# Altium PCB VECTOR_routed_no_sc.PcbDoc (part 2 of 3)
Units mil, origin at the board's own origin, x right, y up, seen from the top; angles counter-clockwise.
Board outline 6000 x 4000 mil, 8 copper layers (Top Layer, Signal Layer 1, Signal Layer 2, Signal Layer 3, Signal Layer 4, VCC, Ground, Bottom Layer), stack 66.302 mil thick; 115 components, 252 nets, 1062 pads, 531 vias.
Unrouted connection lines stored in the file: 3.
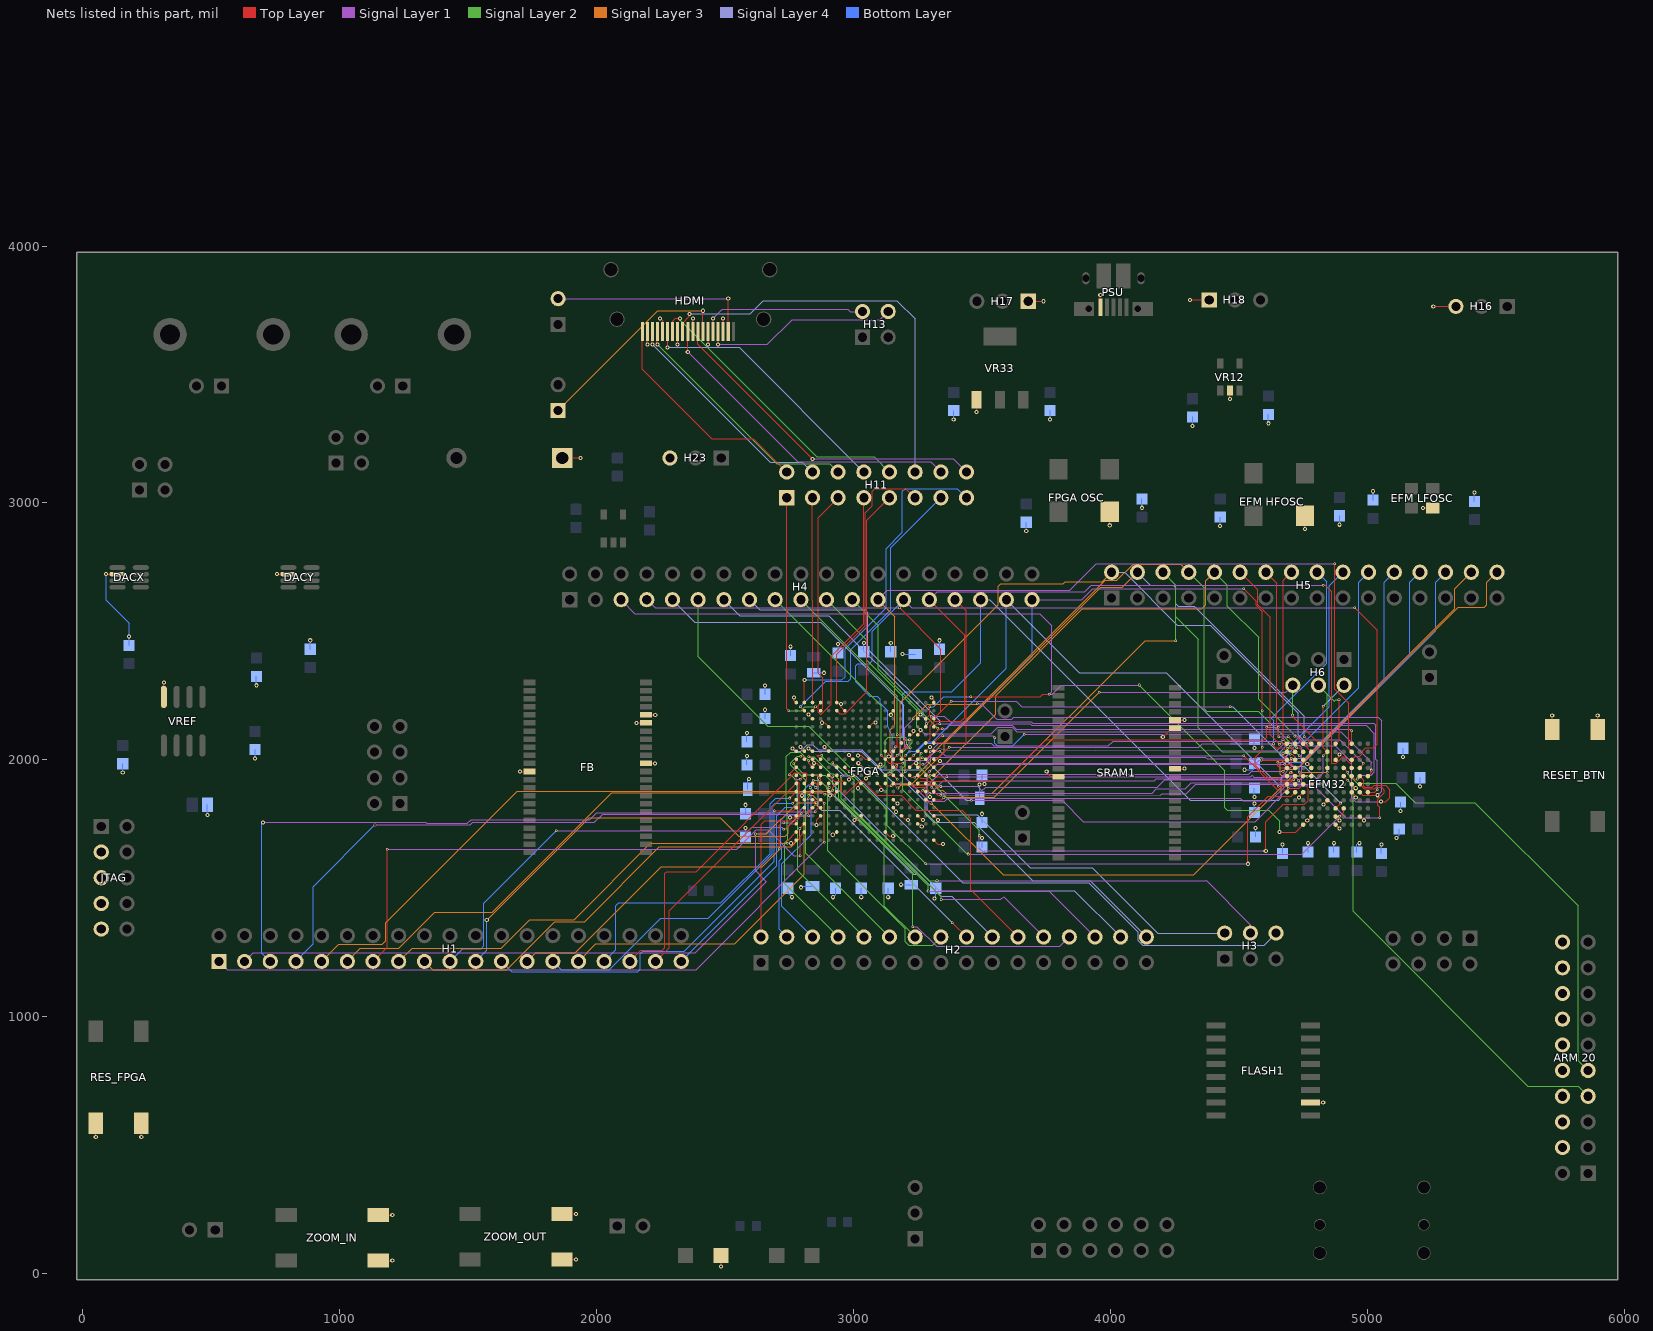
[diagram p8: the nets of this part, all layers, seen from the top]

## Via types
v1: diameter 10, hole 6, Top Layer to Bottom Layer, 277 vias
v2: diameter 16, hole 8, Top Layer to Bottom Layer, 252 vias
v3: diameter 10/10/10/10/10/10 (per signal layer), hole 6, Top Layer to Bottom Layer, 2 vias

## Nets (pads, with @x,y where several pads share a name; then routed paths per layer and width w, separated by ;. In a path a pad name is that pad's centre, name@x,y a point inside that pad or via, vN(x,y) a via of type N, cw(c..) or ccw(c..) an arc to the next point about the centre after c; other vN are vias at no path point) (continued)
EBI.A2: EFM32.L3 FPGA.C17 H4.5 | length 3890.4
  Top Layer w4: FPGA.C17@3281.22,2159.72 3297,2175.5 v1(3297,2206) ; v1(3457,2245) 3727.11,2245 3737,2254.88 v1@3761.88,2254.88 ; v2(4659,1718) 4720.99,1718 EFM32.L3@4750.51,1747.52
  Signal Layer 1 w4: H4.5@2095.08,2623.03 2149.11,2569 3724,2569 3772,2521 3772,2265 v1(3762,2255) 3773,2255 3809,2291 v1(4113,2291)
  Signal Layer 2 w4: v1(4113,2291) 4113,2290 4445,1958 4445,1814 4455,1804 4616,1804 4659,1761 v2(4659,1718)
  Bottom Layer w4: v1(3297,2206) 3312,2206 3351,2245 v1(3457,2245)
EBI.A3: EFM32.J7 FPGA.C18 H4.7 | length 3275.2
  Top Layer w4: v1(3179,2591) 3339,2431 3339,2186.01 ; FPGA.C18@3312.72,2159.72 3339,2186.01 ; v1(3380.71,2227.72) 3339,2186.01 ; EFM32.J7@4876.5,1810.51 v1(4897.49,1831.51)
  Signal Layer 1 w4: H4.7@2195.08,2623.03 2227.11,2591 v1(3179,2591) ; v1(3380.71,2227.72) 3632.54,2227.72 3654.03,2206.22 v1(4466.52,2206.22)
  Signal Layer 4 w4: v1(4466.52,2206.22) 4475.78,2206.22 4708,1974 4755,1974 v1(4897.49,1831.51)
EBI.A4: EFM32.J8 FPGA.F14 H4.9 | length 3393.2
  Top Layer w4: FPGA.F14@3186.73,2065.24 3199.4,2077.91 3199.4,2078 v1(3218,2078) ; v1(4892,1779.5) 4907.99,1795.49 EFM32.J8@4907.99,1810.51
  Signal Layer 1 w4: v1(3447,1633) 4745.5,1633 v1(4892,1779.5)
  Signal Layer 2 w4: v1(3218,2078) 3228.28,2078 3228.64,2077.64 3228.64,2065.64 3192,2029 3192,2006.16 3201,1997.16 3201,1977 3192,1968 3192,1883.49 3442.49,1633 v1(3447,1633)
  Signal Layer 4 w4: H4.9@2295.08,2623.03 2382.11,2536 2872,2536 3196.46,2211.54 3196.46,2078 v1(3218,2078)
EBI.A5: EFM32.G10 FPGA.G14 H4.11 | length 3810.3
  Top Layer w4: v1(3207.53,2056) 3186.73,2035.2 FPGA.G14@3186.73,2033.74 3198.99,2046 v1(3220,2046) ; EFM32.G10@4970.98,1873.5 4982.49,1862 v2(5040,1862)
  Signal Layer 1 w4: v1(3220,2046) 3204,2046 3199,2051 3199,2124 3233,2158 v1(3233,2159) ; v1(3482,2218) 3498,2218 3558,2158 3616,2158 3623,2165 5043,2165 5056,2152 5056,1878 v2(5040,1862)
  Signal Layer 2 w4: H4.11@2395.08,2623.03 2395.08,2401.92 2666,2131 2825,2131 2986,1970 3111,1970 3124,1983 3124,2076 3135,2087 3201,2087 3207.53,2080.47 v1(3207.53,2056)
  Signal Layer 3 w4: v1(3233,2159) 3233,2163 3287,2217 3481,2217 v1(3482,2218)
EBI.A6: EFM32.G11 FPGA.D17 H4.13 | length 3109.1
  Top Layer w4: FPGA.D17@3281.22,2128.23 3281.22,2140.2 3282.02,2141 v1(3284,2141) 3284,2142.98 3286.98,2140 3303,2156.02 v1(3303,2170) ; EFM32.G11@5002.48,1873.5 5029,1873.5 v1(5039,1883.5)
  Signal Layer 1 w4: v1(3303,2170) 3354,2170 3376,2148 3691,2148 3697,2142 5026,2142 5033,2135 5033,2002.5 5039,1996.5 v1(5039,1883.5)
  Signal Layer 4 w4: H4.13@2495.08,2623.03 2557.11,2561 2904,2561 3271,2194 3271,2164.94 3284,2151.94 v1(3284,2141)
EBI.A7: EFM32.E9 FPGA.D18 H4.15 | length 3020.4
  Top Layer w4: FPGA.D18@3312.72,2128.23 3324.49,2140 v1(3336,2140) ; EFM32.E9@4939.49,1936.5 4950.98,1925 v3(4961,1925)
  Signal Layer 1 w4: v1(3336,2140) 3688,2140 3694,2134 4996,2134 5028,2102 5028,1953 5015,1940 4976,1940 v3(4961,1925)
  Signal Layer 4 w4: H4.15@2595.08,2623.03 2634.11,2584 3045,2584 3056,2573 3056,2431 3336,2151 v1(3336,2140)
EBI.A8: EFM32.E10 FPGA.H12 H4.17 | length 3177.4
  Top Layer w4: v1(3108,2017.98) FPGA.H12@3123.74,2002.24 3138.98,1987 v1(3191,1987) ; EFM32.E10@4970.98,1936.5 4987,1920.48 4987,1896 4990,1893 5020,1893 5027,1900 5071,1900 5087,1884 5087,1852 5072,1837 v2(5053,1837)
  Signal Layer 1 w4: v1(3191,1987) 3202,1998 3283,1998 3329,2044 3364,2039 4521,2035 4647,2035 4679,2067 4745,2067 4757,2055 4875,2055 4940,1990 4940,1852 4955,1837 v2(5053,1837)
  Signal Layer 2 w4: H4.17@2695.08,2623.03 3108,2210.11 v1(3108,2017.98)
EBI.A9: EFM32.F10 FPGA.G13 H4.19 | length 3144.8
  Top Layer w4: v1(3163,2050) 3174,2050 3170.98,2053.02 v1(3170.98,2098) ; EFM32.F10@4970.98,1905 4988.08,1887.9 5029,1887.9 5034.6,1893.5 5055.5,1893.5 5067,1882 5067,1872 5041,1846 5041,1823 5049,1815 v1(5049,1774.99) ; FPGA.G13@3155.24,2033.74 3155.24,2042 3170.76,2057.52 3155.38,2042.61 FPGA.G13@3155.24,2033.74
  Signal Layer 1 w4: v1(3163,2050) 3163,2041 3155,2033 3155,1976.97 3292.97,1839 3355,1839 3366,1850 4505,1850 4515,1840 4623,1840 4682,1899 4792,1899 4916.01,1774.99 v1(5049,1774.99)
  Signal Layer 2 w4: H4.19@2795.08,2623.03 3170.98,2247.13 v1(3170.98,2098)
EBI.A10: EFM32.E11 FPGA.E16 H4.21 | length 2571.3
  Top Layer w4: FPGA.E16@3249.72,2096.73 3261.42,2108.42 v2(3261.42,2116.54) ; EFM32.E11@5002.48,1936.5 5016,1950.02 v1(5016,1960)
  Signal Layer 1 w4: v2(3261.42,2116.54) 3275.95,2102 3537,2102 3562,2127 3617,2127 3635.77,2108.23 4897.73,2108.23 5018,1987.96 5016,1985.96 v1(5016,1960)
  Signal Layer 2 w4: H4.21@2895.08,2623.03 3052,2466.11 3052,2387 3247,2192 3247,2130.95 v2(3261.42,2116.54)
EBI.A11: EFM32.A9 FPGA.E18 H4.23 | length 2349.6
  Top Layer w4: FPGA.E18@3312.72,2096.73 3328.46,2112.48 ; v1(3328.46,2122) 3328.46,2112.48 ; v1(3345,2121) 3336.98,2121 3328.46,2112.48 ; EFM32.A9@4939.49,2062.48 v1(4939.49,2112.23)
  Signal Layer 1 w4: v1(3345,2121) 3361.94,2121 3374.94,2134 3617.53,2134 3633.53,2118 4933.72,2118 v1(4939.49,2112.23)
  Signal Layer 2 w4: H4.23@2995.08,2623.03 3095.78,2522.33 3095.78,2354.69 v1(3328.46,2122)
EBI.A12: EFM32.B9 FPGA.K12 H4.25 | length 3336.6
  Top Layer w4: FPGA.K12@3123.74,1939.25 3140.24,1939.25 3142,1941.01 v1(3142,1947) ; v1(4873,2763) 4873,2275 4928,2220 4928,2042.47 EFM32.B9@4939.49,2030.98
  Signal Layer 1 w4: H4.25@3095.08,2623.03 3132.05,2660 3842,2660 3945,2763 v1(4873,2763)
  Signal Layer 3 w4: H4.25@3095.08,2623.03 3161,2557.11 3161,2136 3142,2117 3142,2030 3148,2024 3148,1953 v1(3142,1947)
EBI.A13: EFM32.C9 FPGA.K13 H4.27 | length 3370.7
  Top Layer w4: FPGA.K13@3155.24,1939.25 3170.49,1924 v1(3171,1924) ; EFM32.C9@4939.49,1999.49 4954,2014 4971,2014 4982,2025 4982,2035 4994,2047 5025,2047 5038,2060 5038,2504 v1(4951,2591)
  Signal Layer 1 w4: H4.27@3195.08,2623.03 3227.11,2591 v1(4951,2591)
  Bottom Layer w4: v1(3171,1924) 3150,1945 3150,2087.22 3134,2128.11 3134,2190.21 3103.94,2220.28 3103.94,2235.63 3091.57,2248 3063,2248 3008,2303 3008,2365 3017,2374 3061,2374 3072,2385 3072,2499.95 H4.27@3195.08,2623.03
EBI.A14: EFM32.D9 FPGA.F17 H4.29 | length 3121.9
  Top Layer w4: FPGA.F17@3281.22,2065.24 3297.99,2082.01 3297.99,2131.99 3315,2149 3418,2149 3433,2164 3433,2485.11 H4.29@3295.08,2623.03 ; v1(4829,2680) 4837,2680 4862,2655 4862,1987 4880,1987 4904,2011 4913,2011 4921,2003 4921,1998.49 4939.49,1980 EFM32.D9@4939.49,1967.99
  Signal Layer 1 w4: H4.29@3295.08,2623.03 3326.61,2654.56 3899.56,2654.56 3925,2680 v1(4829,2680)
EBI.A15: EFM32.D10 FPGA.F18 H4.31 | length 2499.9
  Top Layer w4: v1(3348,2094) 3341.48,2094 FPGA.F18@3312.72,2065.24 3432.25,2065.24 3438,2070.98 3438,2580.11 H4.31@3395.08,2623.03 ; EFM32.D10@4970.98,1967.99 4985,1982.01 v1(4985,1986)
  Signal Layer 1 w4: v1(3348,2094) 3542,2094 v1(3550,2086) ; v1(3665,2100) 4203.02,2100 4223.02,2101.73 4720,2100 4741.63,2078.37 4892.63,2078.37 v1(4985,1986)
  Bottom Layer w4: v1(3550,2086) 3550,2065 3560,2055 3620,2055 v1(3665,2100)
EBI.A16: EFM32.E4 FPGA.H13 H4.33 | length 2560.5
  Top Layer w4: FPGA.H13@3155.24,2002.24 v1(3170.98,2017.99) ; v1(4766.25,1936) 4781.51,1936 EFM32.E4@4782.01,1936.5
  Signal Layer 4 w4: H4.33@3495.08,2623.03 3529.97,2623.03 4310,1843 4655,1843 4666,1854 4666,1928 4675,1937 4765.25,1937 v1(4766.25,1936)
  Bottom Layer w4: v1(3170.98,2017.99) 3184.45,2031.46 3184.45,2085.95 3190.98,2092.49 3190.98,2255 3200.98,2265 3382,2265 3495.08,2378.08 H4.33@3495.08,2623.03
EBI.A17: EFM32.F1 FPGA.H14 H4.35 | length 2220.7
  Top Layer w4: FPGA.H14@3186.73,2002.24 v1(3202.48,2017.99) ; v1(4654,1897) 4679.52,1897 EFM32.F1@4687.52,1905
  Signal Layer 4 w4: H4.35@3595.08,2623.03 3879.11,2339 4217,2339 4654,1902 v1(4654,1897)
  Bottom Layer w4: v1(3202.48,2017.99) 3217.49,2033 3242.48,2033 3279.48,2070 3308,2070 3595.08,2357.08 H4.35@3595.08,2623.03
EBI.A18: EFM32.F2 FPGA.H15 H4.37 | length 2616.9
  Top Layer w4: FPGA.H15@3218.23,2002.24 v1(3233.98,2017.99) ; v1(4519,2666) 4567,2618 4567,2601.47 4592,2576.47 v1(4592,2190) ; v1(4592,2048) 4592,2037 4564.49,2009.49 4564.49,1979.51 4614,1930 4650,1930 4661,1919 4701.64,1919 4706,1914.64 4709.38,1914.64 EFM32.F2@4719.02,1905
  Signal Layer 1 w4: H4.37@3695.08,2623.03 3888.03,2623.03 3931,2666 v1(4519,2666)
  Bottom Layer w4: v1(3233.98,2017.99) 3279.98,2064 3353.98,2064 3695.08,2405.09 H4.37@3695.08,2623.03 ; v1(4592,2048) v1(4592,2190)
EBI.A19: EFM32.F3 FPGA.H16 | length 1661.8
  Top Layer w4: FPGA.H16@3249.72,2002.24 3255.48,2008 v1(3268,2008) ; v1(4693,1889) 4734.51,1889 EFM32.F3@4750.51,1905
  Signal Layer 1 w4: v1(3458,1842) 3812,1842 3895,1759 4563,1759 v1(4693,1889)
  Signal Layer 4 w4: 3273,2008 3439,1842 v1(3458,1842)
EBI.A20: EFM32.F4 FPGA.G16 | length 1991.7
  Top Layer w4: FPGA.G16@3249.72,2033.74 3257.46,2026 v1(3264,2026) ; v2(4605,1645) 4605,1758 4673,1826 4755,1826 4770,1841 4770,1892.99 EFM32.F4@4782.01,1905
  Signal Layer 1 w4: v1(3490,1705) 3490,1655 3506,1639 3512,1645 v2(4605,1645)
  Signal Layer 2 w4: v1(3264,2026) 3259,2021 3259,1968 3330,1897 3330,1885 3490,1725 v1(3490,1705)
EBI.A21: EFM32.G1 FPGA.G18 | length 1441.2
  Top Layer w4: FPGA.G18@3312.72,2033.74 v1(3335,2033.74) ; v1(4518.5,2015) 4650.5,1883 4678.02,1883 EFM32.G1@4687.52,1873.5
  Signal Layer 1 w4: v1(3335,2033.74) 3338.26,2033.74 3357,2015 v1(4518.5,2015)
EBI.A22: EFM32.G2 FPGA.J13 | length 2154.3
  Top Layer w4: FPGA.J13@3155.24,1970.75 3169.75,1970.75 3168,1972.5 v1(3168,1979) ; v2(4535,1595) 4535,1779 4614,1858 4703.51,1858 EFM32.G2@4719.02,1873.5
  Signal Layer 1 w4: v1(3280.68,1595) v2(4535,1595)
  Signal Layer 2 w4: v1(3168,1979) 3168,1969 3157,1958 3142,1958 3132,1948 3132,1743.68 v1(3280.68,1595)
EBI.CS0: EFM32.D6
EBI.CS1: EFM32.A5 FPGA.N18 H6.6 | length 1852.8
  Top Layer w4: FPGA.N18@3312.72,1844.76 3335,1845 3342.47,1845 v1(3350.47,1853) ; v1(4709,2174) 4709,2166.98 EFM32.A5@4813.5,2062.48
  Signal Layer 1 w4: v1(3956,2263) 4683,2263 H6.6@4710,2290
  Signal Layer 2 w4: v1(4709,2174) 4709,2289 H6.6@4710,2290
  Signal Layer 3 w4: v1(3350.47,1853) 3351.47,1854 3547,1854 v1(3956,2263)
EBI.D0: EFM32.B4 FPGA.K14 H5.2 | length 2498.4
  Top Layer w4: FPGA.K14@3186.73,1939.25 v1(3201,1953.52) ; v1(4766,2065) 4766,2046.99 EFM32.B4@4782.01,2030.98
  Signal Layer 3 w4: v1(3201,1953.52) 3201,1997.16 3182,2016.16 3182,2222.18 3563,2603.18 3563,2675 3574,2686 3817,2686 3824,2693 3968,2693 H5.2@4005,2730
  Signal Layer 4 w4: H5.2@4005,2730 4055,2730 4261,2524 4388,2524 4731.34,2180.66 4731.34,2096.66 4763,2065 v1(4766,2065)
EBI.D1: EFM32.A4 FPGA.L12 H5.4 | length 2385.4
  Top Layer w4: FPGA.L12@3123.74,1907.76 3133.5,1898 v1(3146,1898) ; v1(4755,2089.49) EFM32.A4@4782.01,2062.48
  Signal Layer 3 w4: v1(3146,1898) 3146,1899 3154,1907 3228.59,1907 3353,2031.41 3353,2063 3962,2672 4047,2672 H5.4@4105,2730
  Signal Layer 4 w4: H5.4@4105,2730 4155,2680 4245,2680 4255,2670 4255,2608 4265,2598 4326,2598 4755,2169 v1(4755,2089.49)
EBI.D2: EFM32.C3 FPGA.L13 H5.6 | length 2587.5
  Top Layer w4: FPGA.L13@3155.24,1907.76 v1(3173,1890) ; v1(4734.76,2015.24) EFM32.C3@4750.51,1999.49
  Signal Layer 2 w4: H5.6@4205,2730 4255,2680 4255,2557 ; v1(4255,2464) 4255,2557 ; v1(4734.76,2015.24) 4719,2031 4436,2031 4342,2125 4342,2470 4255,2557
  Signal Layer 3 w4: v1(3173,1890) 3185,1902 3314,1902 3334,1882 3348,1882 3361,1869 3540,1869 4135,2464 v1(4255,2464)
EBI.D3: EFM32.B3 FPGA.K15 H5.8 | length 2471.6
  Top Layer w4: FPGA.K15@3218.23,1939.25 3225.48,1932 v1(3238,1932) ; v1(4725.66,2046.73) 4734.76,2046.73 EFM32.B3@4750.51,2030.98
  Signal Layer 2 w4: H5.8@4305,2730 4365,2670 4365,2199.5 4375,2189.5 4576,2189.5 4707.57,2057.93 4714.46,2057.93 v1(4725.66,2046.73)
  Signal Layer 3 w4: v1(3238,1932) 3300.49,1994.49 3300.49,2018.49 3980,2698 4025,2698 4089,2762 4273,2762 H5.8@4305,2730
EBI.D4: EFM32.A3 FPGA.K16 H5.10 | length 2401.8
  Top Layer w4: FPGA.K16@3249.72,1939.25 3260.98,1928 3288,1928 v1(3299,1939) ; v1(4718,2092) 4720.99,2092 EFM32.A3@4750.51,2062.48
  Signal Layer 2 w4: H5.10@4405,2730 4455,2680 4455,2598 4577,2476 4577,2235.99 4718,2094.99 v1(4718,2092)
  Signal Layer 3 w4: v1(3299,1939) 3315,1939 3553,2177 3553,2250 3890,2587 4355,2587 4371,2603 4371,2696 H5.10@4405,2730
EBI.D5: EFM32.B2 FPGA.L15 H5.12 | length 2592.9
  Top Layer w4: FPGA.L15@3218.23,1907.76 3233.98,1892 3279,1892 3292,1879 3292,1875 v1(3297,1870) ; H5.12@4505,2730 4573.47,2661.53 4573.47,2603.53 4623,2554 4623,2097 4657,2063 v1(4657,2061) ; v1(4690,2045) 4707.02,2045 ; v1(4700.02,2053) 4707.02,2046 4707.02,2045 ; 4707.02,2045 EFM32.B2@4719.02,2030.98 4707.02,2042.98 4707.02,2045
  Signal Layer 1 w4: v1(3297,1870) 3298,1869 4162,1869 4179.26,1886.26 4292.26,1886.26 4315.68,1909.68 4745,1909.68 4745,2047 4735,2057 4704.02,2057 v1(4700.02,2053)
  Signal Layer 3 w4: v1(4657,2061) 4660,2061 4667,2068 v1(4690,2045)
EBI.D6: EFM32.A2 FPGA.L16 H5.14 | length 2252.9
  Top Layer w4: FPGA.L16@3249.72,1907.76 3258.97,1917 3589,1917 3749,2077 4598,2077 4608,2087 v1(4608,2126) ; H5.14@4605,2730 4647,2688 4647,2132 v1(4653,2126) 4653,2092 v1(4655,2090) ; v1(4692,2090) 4719.02,2062.98 EFM32.A2@4719.02,2062.48
  Signal Layer 1 w4: v1(4608,2126) v1(4653,2126) ; v1(4655,2090) v1(4692,2090)
EBI.D7: EFM32.A1 FPGA.H17 H5.16 | length 2123.7
  Top Layer w4: FPGA.H17@3281.22,2002.24 3299,2020.02 v3(3299,2031) ; EFM32.A1@4687.52,2062.48 v1(4672,2078) 4673,2698 H5.16@4705,2730
  Signal Layer 1 w4: v3(3299,2031) 3332,2064 3537,2064 3546.53,2054.47 3992.5,2054.47 4010.76,2072.73 4666.73,2072.73 v1(4672,2078)
EBI.D8: EFM32.B1 FPGA.H18 H5.18 | length 2193.2
  Top Layer w4: FPGA.H18@3312.72,2002.24 3326.24,2002.24 v1(3373,2049) ; v1(4635,2063) 4635,2054 4641.57,2047.43 4671.08,2047.43 EFM32.B1@4687.52,2030.98
  Signal Layer 1 w4: v1(3373,2049) 4343,2049 4357,2063 v1(4635,2063)
  Bottom Layer w4: v1(4635,2063) 4635,2153 4627,2161 4842,2376 4842,2693 H5.18@4805,2730
EBI.D9: EFM32.C2 FPGA.J16 H5.20 | length 2388.7
  Top Layer w4: FPGA.J16@3249.72,1970.75 3261.98,1983 v1(3269,1983) ; v1(4701,2021) 4708,2021 4719.02,2009.98 EFM32.C2@4719.02,1999.49
  Signal Layer 1 w4: v1(3269,1983) 3278,1983 3305,2010 4370,2010 4377,2003 4567,2003 4574,2010 4589,2010 4596,2003 4674,2003 4692,2021 v1(4701,2021)
  Bottom Layer w4: v1(4701,2021) 4692,2021 4676.24,2005.24 4661.77,2018.46 4661.77,2031.77 4695,2065 4710,2065 4852,2207 4852,2677 H5.20@4905,2730
EBI.D10: EFM32.C1 FPGA.J18 H5.22 | length 2295.1
  Top Layer w4: FPGA.J18@3312.72,1970.75 v2(3337,1995) ; v1(4588,1999) 4687.03,1999 EFM32.C1@4687.52,1999.49 4672,2015.01 v1(4672,2023)
  Signal Layer 1 w4: v2(3337,1995) 3345,1987 4567,1987 4579,1999 v1(4588,1999)
  Bottom Layer w4: v1(4672,2023) 4672,2020.46 4671.77,2020.24 4689.16,2035.62 4705,2035.62 4715.34,2050.57 4739.26,2074.49 4760.31,2074.49 4966,2280.17 4966,2691 H5.22@5005,2730
EBI.D11: EFM32.D2 FPGA.K17 H5.24 | length 2415.8
  Top Layer w4: FPGA.K17@3281.22,1939.25 v1(3297,1955) ; v1(4678,1982) 4705.01,1982 4711.01,1976 ; v1(4703.27,2005) 4703.27,1983.74 4711.01,1976 ; EFM32.D2@4719.02,1967.99 4711.01,1976
  Signal Layer 1 w4: v1(3297,1955) 3324,1982 v1(4678,1982)
  Bottom Layer w4: v1(4703.27,2005) 4756,2005 5066,2315 5066,2691 H5.24@5105,2730
EBI.D12: EFM32.D1 FPGA.K18 H5.26 | length 2560.9
  Top Layer w4: FPGA.K18@3312.72,1939.25 3318.97,1933 v1(3363,1933) ; v1(4652,1990) 4652,1976 4660.01,1967.99 EFM32.D1@4687.52,1967.99
  Signal Layer 1 w4: v1(3363,1933) 4545.75,1933 4552,1939.25 4559,1932.25 4665.25,1932.25 4706,1975 4691,1990 v1(4652,1990)
  Bottom Layer w4: v1(4652,1990) 4739.26,1990 4743.26,1986 5166,2408.74 5166,2691 H5.26@5205,2730
EBI.D13: EFM32.E3 FPGA.L17 H5.28 | length 2550.9
  Top Layer w4: FPGA.L17@3281.22,1907.76 3300,1907.76 3300,1898 v1(3305,1893) ; v1(4733,1919) EFM32.E3@4750.51,1936.5 v1(4735,1952)
  Signal Layer 1 w4: v1(3305,1893) 3310,1888 3319,1888 3350,1919 4170,1919 4178,1927 4666.5,1927 4672.5,1933 4719,1933 v1(4733,1919)
  Bottom Layer w4: v1(4735,1952) 4735,1971.5 5266,2502.5 5266,2691 H5.28@5305,2730
EBI.D14: EFM32.E2 FPGA.L18 H5.30 | length 2675.8
  Top Layer w4: FPGA.L18@3312.72,1907.76 3324.47,1896 v1(3339,1896) ; v1(4703,1952) 4703.51,1952 EFM32.E2@4719.02,1936.5 4705.52,1923 4706.52,1922 v1(4714,1922)
  Signal Layer 1 w4: v1(3339,1896) 3483,1896 3500,1879 3514,1893 4183,1893 4212,1922 v1(4714,1922)
  Signal Layer 3 w4: v1(4703,1952) 4684,1933 4673,1933 4662,1944 4662,1985.74 4675,1998.74 4684.26,1998.74 4749,1995 5341,2587 5341,2666 H5.30@5405,2730
EBI.D15: EFM32.E1 FPGA.M16 H5.32 | length 2685.1
  Top Layer w4: FPGA.M16@3249.72,1876.26 3265,1876.26 v1(3269.32,1880.58) ; v1(4672,1955.35) 4672,1952.02 EFM32.E1@4687.52,1936.5
  Signal Layer 1 w4: v1(3269.32,1880.58) 3331.99,1943.25 4538.25,1943.25 4550.35,1955.35 v1(4672,1955.35)
  Signal Layer 3 w4: v1(4672,1955.35) 4672.35,1955.35 4681,1964 4726,1964 5355,2593 5455,2593 5466,2604 5466,2691 H5.32@5505,2730
EBI.REN: EFM32.A7 FPGA.N17 H6.4 | length 2437.6
  Top Layer w4: FPGA.N17@3281.22,1844.76 3296.98,1829 v1(3305,1829) ; EFM32.A7@4876.5,2062.48 4890,2075.98 v1(4890,2233)
  Signal Layer 2 w4: H6.4@4810,2290 4845,2255 ; v1(4844,1951) 4844,2254 4845,2255 ; v1(4890,2233) 4877,2233 4872,2228 4845,2255
  Signal Layer 3 w4: v1(3305,1829) 3582,1552 4325.3,1552 4710.3,1937 4733,1937 4747,1951 v1(4844,1951)
EBI.WEN: EFM32.B6 FPGA.M18 H6.2 | length 1947.3
  Top Layer w4: FPGA.M18@3312.72,1876.26 3326.98,1862 v1@3340,1862 ; v1(4828.98,2014.97) EFM32.B6@4845,2030.98 4828.98,2047 v1(4829,2209)
  Signal Layer 1 w4: v1@3340,1862 3342,1864 3360,1864 4195,1861 4201.5,1867.5 4294.5,1867.5 4332,1905 4784.98,1905 4828.98,1949 v1(4828.98,2014.97)
  Signal Layer 4 w4: v1(4829,2209) H6.2@4910,2290
  other v1: 3340,1861
FB.A0: FPGA.N4 H1.1 | length 2747.7
  Top Layer w4: FPGA.N4@2871.77,1844.76 v1(2886.22,1830.32)
  Signal Layer 1 w4: H1.1@529.33,1215.16 561.49,1183 2387,1183 2882.94,1678.94 v1(2886.02,1678.94)
  Signal Layer 3 w4: v1(2886.02,1678.94) 2886.02,1830.51 v1(2886.22,1830.32)
FB.A1: FPGA.N3 H1.3 | length 2669
  Top Layer w4: FPGA.N3@2840.28,1844.76 2842.24,1844.76 v1(2854,1833)
  Signal Layer 1 w4: H1.3@629.33,1215.16 662.17,1248 2384,1248 2661,1525 2619,1567 2619,1710 v1(2618,1711)
  Signal Layer 3 w4: v1(2618,1711) 2619,1712 2661,1712 2782,1833 v1(2854,1833)
FB.A2: FPGA.P4 H1.5 | length 2755.5
  Top Layer w4: v1(2851,1798) 2851,1801 2863.27,1813.27 FPGA.P4@2871.77,1813.27
  Signal Layer 1 w4: v2(701,1756) 1334,1756 1338,1752 1497,1752 1511,1766 1974,1766 2001,1793 2714,1793 2719,1798 v1(2851,1798)
  Bottom Layer w4: v2(701,1756) 697,1752 697,1247.49 H1.5@729.33,1215.16
FB.A3: FPGA.P3 H1.7 | length 2403.8
  Top Layer w4: v1(2825,1782) 2825,1797.99 FPGA.P3@2840.28,1813.27
  Signal Layer 1 w4: v1(1137,1746) 1508,1746 1518,1756 1991,1756 2023,1788 2783,1788 2789,1782 v1(2825,1782)
  Bottom Layer w4: H1.7@829.33,1215.16 897,1282.83 897,1506 v1(1137,1746)
FB.A4: FPGA.L6 H1.9 | length 2340.4
  Top Layer w4: v1(2919.02,1881) 2919.02,1892.01 FPGA.L6@2934.76,1907.76
  Signal Layer 3 w4: H1.9@929.33,1215.16 996.17,1282 1166,1282 1179,1295 1179,1366 1690.01,1877.01 2915.02,1877.01 v1(2919.02,1881)
FB.A5: FPGA.M5 H1.11 | length 2152.7
  Top Layer w4: v1(2888,1866) 2893.01,1866 FPGA.M5@2903.27,1876.26
  Signal Layer 3 w4: H1.11@1029.33,1215.16 1080.17,1266 1229,1266 1370,1407 1593,1407 2058,1872 2882,1872 v1(2888,1866)
FB.A6: FPGA.U2 H1.13 | length 2239.5
  Top Layer w4: H1.13@1129.33,1215.16 1185,1270.83 v1(1185,1651) ; v1(2793,1626) 2793,1703 FPGA.U2@2808.78,1718.78
  Signal Layer 1 w4: v1(1185,1651) 2546,1651 2622,1727 2667.08,1727 2768.08,1626 v1(2793,1626)
FB.A7: FPGA.U1 H1.15 | length 1762.4
  Top Layer w4: v1(2742,1675) 2742,1683.5 FPGA.U1@2777.28,1718.78
  Signal Layer 3 w4: H1.15@1229.33,1215.16 1281.17,1267 1629,1267 1739,1377 1912,1377 2211,1676 2212,1675 v1(2742,1675)
FB.A8: FPGA.T2 H1.17 | length 1750.3
  Top Layer w4: v1(2790.79,1732.28) FPGA.T2@2808.78,1750.28
  Signal Layer 3 w4: H1.17@1329.33,1215.16 1361.49,1183 1649,1183 1836,1370 1953,1370 2244,1661 2758,1661 2790.79,1693.79 v1(2790.79,1732.28)
FB.A9: FPGA.T1 H1.19 | length 1674.1
  Top Layer w4: v1(2728,1730) 2735,1730 2755.28,1750.28 FPGA.T1@2777.28,1750.28
  Signal Layer 1 w4: v1(1843,1724) 2590,1724 2604,1738 2720,1738 v1(2728,1730)
  Bottom Layer w4: H1.19@1429.33,1215.16 1479.17,1265 1551,1265 1561,1275 1561,1442 v1(1843,1724)
FB.A10: FPGA.P2 H1.21 | length 1680.3
  Top Layer w4: v1(2797,1789.5) 2797,1792 2808.78,1803.78 FPGA.P2@2808.78,1813.27
  Signal Layer 3 w4: v2(1572,1376) 1971,1775 2481,1775 2554,1702 2735,1702 2746,1713 2746,1741 2794.5,1789.5 v1(2797,1789.5)
  Bottom Layer w4: H1.21@1529.33,1215.16 1572,1257.83 v2(1572,1376)
FB.A11: FPGA.P1 H1.23 | length 1578.9
  Top Layer w4: v1(2691,1801) 2765.02,1801 FPGA.P1@2777.28,1813.27
  Bottom Layer w4: H1.23@1629.33,1215.16 1669.49,1175 2159,1175 2169,1185 2169,1245 2179,1255 2341,1255 2691,1605 v1(2691,1801)
FB.A12: FPGA.N2 H1.25 | length 1462.9
  Top Layer w4: v1(2710,1653) 2710,1743 2709,1744 2720,1755 v1(2729,1755) ; FPGA.N2@2808.78,1844.76 2819.76,1844.76 v1(2824,1849)
  Signal Layer 3 w4: H1.25@1729.33,1215.16 1763.17,1249 1917,1249 2251,1583 2644,1583 2710,1649 v1(2710,1653)
  Bottom Layer w4: v1(2729,1755) 2760,1755 2787,1782 2811,1782 2824,1795 v1(2824,1849)
FB.A13: FPGA.N1 H1.27 | length 1344.9
  Top Layer w4: v1(2763.52,1831) FPGA.N1@2777.28,1844.76
  Bottom Layer w4: H1.27@1829.33,1215.16 1861.49,1183 2049,1183 2249,1383 2434,1383 2683,1632 2683,1819 2695,1831 v1(2763.52,1831)
FB.A14: FPGA.M3 H1.29 | length 1398.5
  Top Layer w4: v1(2825,1861) FPGA.M3@2840.28,1876.26
  Signal Layer 3 w4: H1.29@1929.33,1215.16 1997.17,1283 2537,1283 2809,1555 2809,1782.52 2851.48,1825 2858,1825 2862,1829 2862,1840 2841,1861 v1(2825,1861)
FB.A15: FPGA.M1 H1.31 | length 1235.7
  Top Layer w4: v1(2752,1850.98) FPGA.M1@2777.28,1876.26
  Bottom Layer w4: H1.31@2029.33,1215.16 2074,1259.83 2074,1432 2085,1443 2483,1443 2675,1635 2675,1828 2697.98,1850.98 v1(2752,1850.98)
FB.A16: FPGA.L2 H1.33 | length 1204.5
  Top Layer w4: H1.33@2129.33,1215.16 2172.17,1258 2255,1258 2266,1269 2266,1558 2272,1564 2387,1564 2772,1949 2813.8,1949 2818,1944.8 2818,1916.98 FPGA.L2@2808.78,1907.76
FB.A17: FPGA.L1 H1.35 | length 919.6
  Top Layer w4: H1.35@2229.33,1215.16 2282,1267.83 2282,1412.47 FPGA.L1@2777.28,1907.76
FB.A18: FPGA.K2 H1.37 | length 950.5
  Top Layer w4: v1(2792.13,1923.62) 2793.15,1923.62 FPGA.K2@2808.78,1939.25
  Bottom Layer w4: H1.37@2329.33,1215.16 2702,1587.83 2702,1782 2735,1815 2771,1815 2781,1825 2781,1923 2781.62,1923.62 v1(2792.13,1923.62)
FB.CS: FPGA.J6 H3.6 | length 2089
  Top Layer w4: v1(2919,1989) 2919,1986.51 FPGA.J6@2934.76,1970.75
  Signal Layer 4 w4: v1(2919,1989) 2919,1980 2961,1938 3009,1938 3426,1521 3915.47,1521 4108.47,1328 4108.47,1295 4125,1278.47 4598.47,1278.47 H3.6@4645,1325
FB.D0: FPGA.K1 H2.2 | length 768
  Top Layer w4: H2.2@2640,1310 2640,1749 2654,1763 2777.08,1763 2789.08,1775 2789.08,1908.81 2777.28,1920.61 FPGA.K1@2777.28,1939.25
FB.D1: FPGA.L4 H2.4 | length 734.5
  Top Layer w4: v1(2853,1892) 2861,1900 2864.02,1900 FPGA.L4@2871.77,1907.76
  Bottom Layer w4: H2.4@2740,1310 2710,1340 2710,1606 2720,1616 2720,1660 2717,1663 2717,1765 2738,1786 2776.51,1786 2811,1820.49 2811,1888 2825,1902 2843,1902 v1(2853,1892)
FB.D2: FPGA.L3 H2.6 | length 698.9
  Top Layer w4: v1(2832,1892) 2832,1899.48 FPGA.L3@2840.28,1907.76
  Bottom Layer w4: v1(2832,1892) 2835,1889 2835,1709 2721,1595 2721,1429 H2.6@2840,1310
FB.D3: FPGA.J3 H2.8 | length 930.9
  Top Layer w4: v1(2825,1995.94) 2825,1986.02 FPGA.J3@2840.28,1970.75
  Signal Layer 2 w4: v1(2825,1995.94) 2791.94,2029 2755,2029 2739.02,2013.02 2739.02,1840.98 2742,1686 2732.28,1676.28 2732.28,1517.72 H2.8@2940,1310
FB.D4: FPGA.J1 H2.10 | length 798.4
  Top Layer w4: v1(2749,1941) 2747.82,1941 2747.68,1941.14 FPGA.J1@2777.28,1970.75
  Signal Layer 2 w4: v1(2749,1941) 2754.72,1941 2754.86,1941.14 2783,1913 2783,1567 H2.10@3040,1310
FB.D5: FPGA.H2 H2.12 | length 911
  Top Layer w4: v1(2795,2013) 2807.87,2013 2808.78,2012.09 FPGA.H2@2808.78,2002.24
  Signal Layer 2 w4: v1(2795,2013) 2780,2013 2756,1989 2756,1979 2814,1921 2814,1636 H2.12@3140,1310
FB.D6: FPGA.H1 H2.14 | length 939.3
  Top Layer w4: v1(2767,1983.96) 2777.28,1994.24 FPGA.H1@2777.28,2002.24
  Signal Layer 2 w4: v1(2767,1983.96) 2767,1981.96 2807.96,1941 2868.36,1941 2869.36,1940 2889,1940 2930,1899 2930,1855 3120,1665 3120,1430 H2.14@3240,1310
FB.D7: FPGA.K4 H2.16 | length 1007.4
  Top Layer w4: v1(2844,1920) 2844,1917.48 2856,1905.48 2871.77,1921.25 FPGA.K4@2871.77,1939.25
  Signal Layer 2 w4: v1(2844,1920) 2868,1920 2899,1889 2899,1645 3202,1342 3202,1291 3214.53,1278.47 3308.47,1278.47 H2.16@3340,1310
FB.D8: FPGA.K3 H2.18 | length 931.4
  Top Layer w4: FPGA.K3@2840.28,1939.25 2857.75,1939.25 2863,1934 v1(2863,1929) ; v1(3384,1366) H2.18@3440,1310
  Signal Layer 4 w4: v1(2863,1929) 2863,1825.5 2859.25,1821.75 2877,1804 2946,1804 v1(3384,1366)
FB.D9: FPGA.L5 H2.20 | length 917.8
  Top Layer w4: FPGA.L5@2903.27,1907.76 2896.26,1900.75 2905.01,1892 v1(2906,1892)
  Signal Layer 4 w4: v1(2906,1892) 2900.49,1892 2896.26,1887.77 3229.66,1554.37 3254.63,1554.37 3341,1468 3382,1468 H2.20@3540,1310
FB.D10: FPGA.K5 H2.22 | length 1226.4
  Top Layer w4: FPGA.K5@2903.27,1939.25 2911,1931.52 2911,1930 2925,1916 2929,1916 2929.84,1916.84 2944,1916.84 2952,1908.84 2952,1875 2964,1863 2967.72,1863 3021.72,1917 3036,1917 3091,1862 3185,1862 3243,1804 3424,1804 3457,1771 3457,1493 H2.22@3640,1310
FB.D11: FPGA.H4 H2.24 | length 1284.7
  Top Layer w4: FPGA.H4@2871.77,2002.24 2857.02,2017 v1(2876,2017)
  Signal Layer 1 w4: v1(3341,1456) 3574,1456 3584,1466 H2.24@3740,1310
  Signal Layer 2 w4: v1(2876,2017) 2873,2017 2903.81,1986.19 2908.35,1986.05 2913.4,1981 2935,1981 2977,1939 2984,1939 3003.5,1919.5 3003.5,1803.5 3341,1466 v1(3341,1456)
FB.D12: FPGA.H3 H2.26 | length 1524.9
  Top Layer w4: v1(2825,2012) 2830.52,2012 FPGA.H3@2840.28,2002.24
  Signal Layer 1 w4: v1(3231,1350) 3247,1350 3324,1273 3803,1273 H2.26@3840,1310
  Signal Layer 2 w4: v1(2825,2012) 2845,2012 2912,1945 2922,1945 2943,1924 2943,1847.77 3233,1557.77 3231,1555.77 v1(3231,1350)
FB.D13: FPGA.L7 H2.28 | length 1346.8
  Top Layer w4: v1(2952,1936) 2952,1922.87 2951.57,1922.44 FPGA.L7@2966.26,1907.76
  Signal Layer 1 w4: v1(3290,1489) 3759,1489 3760,1490 H2.28@3940,1310
  Signal Layer 2 w4: v1(2952,1936) 2952,1847.85 2951.57,1847.43 3290,1509 v1(3290,1489)
FB.D14: FPGA.K6 H2.30 | length 1416.6
  Top Layer w4: v1(2919,1933) 2923.16,1933 2932.09,1941.93 FPGA.K6@2934.76,1939.25
  Signal Layer 4 w4: v1(2919,1933) 2919,1904 3333,1490 3860,1490 H2.30@4040,1310
FB.D15: FPGA.G3 H2.32 | length 1665.5
  Top Layer w4: v2(2825,2044) 2830.02,2044 FPGA.G3@2840.28,2033.74
  Signal Layer 4 w4: v2(2825,2044) 2835,2034 3031,2034 3158,1907 3208,1907 3279,1836 3279,1790 3313,1756 3470,1756 3697,1529 3921,1529 H2.32@4140,1310
FB.REN: FPGA.J7 H3.4 | length 1934.3
  Top Layer w4: FPGA.J7@2966.26,1970.75 2966.26,1969.25 v1(2983,1952.51)
  Signal Layer 1 w4: v1(3325,1529) 4372,1529 4373,1530 4545,1358 H3.4@4545,1325
  Signal Layer 2 w4: v1(2983,1952.51) 3127,1808.51 3127,1694 3292,1529 v1(3325,1529)
FB.WEN: FPGA.G1 H3.2 | length 2099.9
  Top Layer w4: v2(2762,2044) 2767.02,2044 FPGA.G1@2777.28,2033.74
  Signal Layer 4 w4: v2(2762,2044) 2772,2034 2795,2034 2820,2059 2842,2059 2862,2039 3032,2039 3110,1961 3265,1961 3286.56,1939.44 3286.56,1804.87 3305,1786.44 3480.98,1786.44 3687.42,1580 3929,1580 4184,1325 H3.2@4445,1325
FPGAB.CLK+: FPGA.B2 H11.13 | length 1114
  Top Layer w4: v1(2793,2207) FPGA.B2@2808.78,2191.22
  Bottom Layer w4: v1(2793,2207) 2891,2305 2980,2305 2990,2315 2990,2429 3145,2584 3145,2825 H11.13@3340,3020
FPGAB.CLK-: FPGA.A2 H11.15 | length 1335.3
  Top Layer w4: FPGA.A2@2808.78,2222.72 v2(2808.78,2311)
  Bottom Layer w4: v2(2808.78,2311) 2955,2311 2968,2324 2968,2432 3127,2591 3127,2822 3190,2885 3190,3045 3201,3056 3404,3056 H11.15@3440,3020
FPGAB.D0+: FPGA.B6 H11.9 | length 950
  Top Layer w4: FPGA.B6@2934.76,2191.22 2946.98,2179 2967,2179 3052,2264 3052,2932 H11.9@3140,3020
FPGAB.D0-: FPGA.A6 H11.11 | length 1066.6
  Top Layer w4: FPGA.A6@2934.76,2222.72 2934.76,2409.85 3046,2521.09 3046,2962 3072,2988 3072,3045 3083,3056 3204,3056 H11.11@3240,3020
FPGAB.D1+: FPGA.B4 H11.5 | length 872
  Top Layer w4: FPGA.B4@2871.77,2191.22 2881,2200.45 2881,2319 2863,2337 2863,2943 H11.5@2940,3020
FPGAB.D1-: FPGA.A4 H11.7 | length 970.5
  Top Layer w4: FPGA.A4@2871.77,2222.72 2862,2212.94 2862,2185 2872,2175 2913,2216 2913,2403 3040,2530 H11.7@3040,3020
FPGAB.D2+: FPGA.B3 H11.1 | length 962.2
  Top Layer w4: H11.1@2740,3020 2740,2199 v1(2748,2191) ; FPGA.B3@2840.28,2191.22 2840.28,2194.28 v1(2852,2206)
  Signal Layer 2 w4: v1(2748,2191) 2796,2191 2811,2206 v1(2852,2206)
FPGAB.D2-: FPGA.A3 H11.3 | length 797.4
  Top Layer w4: H11.3@2840,3020 2840,2621.28 2840.28,2621 FPGA.A3@2840.28,2222.72
GND: "ARM 20.4" "ARM 20.6" "ARM 20.8" "ARM 20.10" "ARM 20.12" "ARM 20.14" "ARM 20.16" "ARM 20.18" "ARM 20.20" "EFM HFOSC.2" "EFM LFOSC.2" "FPGA OSC.2" C1.1 C2.1 C3.1 C4.1 C5.1 C6.1 C7.1 C8.1 C9.1 C10.1 C11.1 C12.1 C13.1 C14.1 C15.1 C16.1 C17.1 C18.1 C19.1 C20.1 C21.1 C22.1 C23.1 C24.1 C25.1 C26.1 C27.1 C28.1 C29.1 C30.1 C31.1 C32.2 C33.2 C34.2 C35.2 C36.2 C37.2 C38.1 C39.2 C40.1 C41.1 C42.1 C43.1 C44.2 C45.2 C46.1 C47.1 C48.2 C49.1 C54.1 C55.1 C56.1 C57.1 C58.1 C59.1 D1.2 D5.2 DACX.6 DACY.6 EFM32.C7 EFM32.D4 EFM32.F9 EFM32.G3 EFM32.G9 EFM32.H6 EFM32.K4 EFM32.K7 EFM32.K10 EFM32.L7 FB.12 FB.34 FB.39 FB.40 FLASH1.10 FPGA.A1 FPGA.A18 FPGA.B7 FPGA.B13 FPGA.C3 FPGA.C16 FPGA.D5 FPGA.D10 FPGA.E15 FPGA.G2 FPGA.G5 FPGA.G12 FPGA.G17 FPGA.H8 FPGA.H10 FPGA.J4 FPGA.J9 FPGA.J11 FPGA.J15 FPGA.K8 FPGA.K10 FPGA.L9 FPGA.L11 FPGA.M2 FPGA.M6 FPGA.M17 FPGA.N13 FPGA.P13 FPGA.R1 FPGA.R4 FPGA.R9 FPGA.R14 FPGA.R16 FPGA.R18 FPGA.T16 FPGA.U6 FPGA.U12 FPGA.V1 FPGA.V18 H16.3 H17.1 H18.1 H23.3 HDMI.2 HDMI.5 HDMI.8 HDMI.11 HDMI.14 HDMI.17 JTAG.3 JTAG.5 JTAG.7 JTAG.9 PSU.5 RES_FPGA.2 RES_FPGA.4 RESET_BTN.1 RESET_BTN.3 SRAM1.12 SRAM1.34 SRAM1.39 SRAM1.40 VR12.2 VR33.1 VREF.4 ZOOM_IN.2 ZOOM_IN.4 ZOOM_OUT.2 ZOOM_OUT.4 | length 5521.2
  Top Layer w4: v2(50,530.66) RES_FPGA.2@50,585 ; v2(90.23,2722.8) DACX.6@134.72,2722.8 ; v2(227.17,530.66) RES_FPGA.4@227.17,585 ; VREF.4@315,2244.49 v2(315,2300.8) ; v2(755.23,2722.8) DACY.6@799.72,2722.8 ; ZOOM_IN.2@1150,50 v2(1204.34,50) ; ZOOM_IN.4@1150,227.17 v2(1204.34,227.17) ; v2(1702,1954.25) FB.12@1738.62,1954.25 ; ZOOM_OUT.2@1865,55 v2(1919.34,55) ; ZOOM_OUT.4@1865,232.17 v2(1919.34,232.17) ; D1.2@1865.91,3175 v2(1937,3175) ; v2(2154.76,2143.23) FB.39@2191.38,2143.23 ; FB.34@2191.38,1985.75 v2(2227.75,1985.75) ; FB.40@2191.38,2174.72 v2(2228,2174.72) ; v2(2197.24,3617.35) HDMI.2@2197.24,3667.76 ; v2(2246.3,3718.16) 2256.3,3708.16 HDMI.5@2256.3,3667.76 ; v2(2315.35,3617.35) HDMI.8@2315.35,3667.76 ; HDMI.11@2374.41,3667.76 v2(2374.41,3718.16) ; v2(2433.46,3617.35) HDMI.14@2433.46,3667.76 ; v2(2484.05,27.94) D5.2@2484.05,70.47 ; HDMI.17@2492.52,3667.76 v2(2492.52,3718.16) ; v2(2753,1775) 2770.51,1775 FPGA.R1@2777.28,1781.77 ; v2(2756,1675) 2765,1675 FPGA.V1@2777.28,1687.28 ; v2(2768,2243) 2768,2232 FPGA.A1@2777.28,2222.72 ; v2(2793.03,2049.49) FPGA.G2@2808.78,2033.74 ; v2(2800,1860) 2808.78,1868.78 FPGA.M2@2808.78,1876.26 ; v2(2824.53,2175.47) FPGA.C3@2840.28,2159.72 ; v2(2846.02,1986.5) 2856.02,1986.5 FPGA.J4@2871.77,1970.75 ; v2(2856.02,1746.02) 2856.02,1766.02 FPGA.R4@2871.77,1781.77 ; v2(2877.52,2143.98) 2887.52,2143.98 FPGA.D5@2903.27,2128.23 ; v2(2887.52,2049.49) FPGA.G5@2903.27,2033.74 ; v2(2909.02,1860.51) 2919.02,1860.51 FPGA.M6@2934.76,1876.26 ; v2(2919.02,1708.03) 2919.02,1703.03 FPGA.U6@2934.76,1718.78 ; v2(2950.51,2216.97) 2950.51,2206.97 FPGA.B7@2966.26,2191.22 ; v2(2982.01,1923.5) FPGA.K8@2997.76,1939.25 ; v2(2982.01,2017.99) FPGA.H8@2997.76,2002.24 ; v2(3003.5,1766.02) 3013.5,1766.02 FPGA.R9@3029.25,1781.77 ; v2(3018,1889) 3016.51,1889 3013.5,1892.01 FPGA.L9@3029.25,1907.76 ; v2(3018,2017) 3031,2017 3045.76,2002.24 FPGA.H10@3060.75,2002.24 ; v2(3018.5,1986.5) 3013.5,1986.5 FPGA.J9@3029.25,1970.75 ; v2(3049,1927) 3060.75,1938.75 FPGA.K10@3060.75,1939.25 ; FPGA.D10@3060.75,2128.23 3077.52,2145 v2(3085,2145) ; FPGA.L11@3092.24,1907.76 3107.99,1892.01 v2(3107.99,1882.01) ; FPGA.J11@3092.24,1970.75 3100,1970.75 3107.99,1978.74 v2(3105.73,1981) ; FPGA.U12@3123.74,1718.78 3139.49,1703.03 v2(3154.49,1703.03) ; FPGA.G12@3123.74,2033.74 3137,2020.48 v2(3137,2013) ; v2(3145,2175) 3145,2180.98 FPGA.B13@3155.24,2191.22 ; FPGA.P13@3155.24,1813.27 3170.98,1797.52 v2(3165.98,1797.52) ; FPGA.N13@3155.24,1844.76 v2(3170.98,1829.02) ; FPGA.R14@3186.73,1781.77 3202.48,1766.02 v2(3212.48,1766.02) ; FPGA.J15@3218.23,1970.75 3233.98,1986.5 v2(3243.98,1986.5) ; FPGA.E15@3218.23,2096.73 3225.71,2096.73 3233.98,2105 v2(3233.98,2112.48) ; FPGA.T16@3249.72,1750.28 3260.2,1750.28 3265.47,1745 v2(3265.47,1739.53) ; FPGA.R16@3249.72,1781.77 3265.47,1766.02 v2(3270.47,1766.02) ; FPGA.C16@3249.72,2159.72 3249.72,2170.2 3255,2175.47 v2(3260.47,2175.47) ; FPGA.M17@3281.22,1876.26 3281.22,1864.29 3290,1855.51 v2(3296.97,1855.51) ; FPGA.G17@3281.22,2033.74 v2(3296.97,2049.49) ; v2(3303,2243) 3312.72,2233.28 FPGA.A18@3312.72,2222.72 ; FPGA.V18@3312.72,1687.28 3328.46,1671.54 v2(3348.46,1671.54) ; FPGA.R18@3312.72,1781.77 v2(3328.46,1766.02) ; v2(3479.45,3354.52) VR33.1@3479.45,3401.97 ; H17.1@3680,3785 v2(3739,3785) ; v2(3752,1955) 3752,1949.25 3767,1934.25 SRAM1.12@3798.62,1934.25 ; PSU.5@3960.63,3762.2 v2(3960.63,3809.65) ; v2(3997.42,2912.79) 3997.42,2965.16 ; v2(4204,2088) 4239.23,2123.23 SRAM1.39@4251.38,2123.23 ; SRAM1.34@4251.38,1965.75 v2(4288,1965.75) ; SRAM1.40@4251.38,2154.72 v2(4288,2154.72) ; v2(4310,3790) H18.1@4385,3790 ; v2(4465,3404.16) VR12.2@4465,3436.85 ; v2(4734.76,1852.76) 4734.76,1857.76 EFM32.G3@4750.51,1873.5 ; v2(4757.42,2897.79) 4757.42,2950.16 ; v2(4766.26,1763.27) EFM32.K4@4782.01,1779.02 ; v2(4766.26,1983.74) EFM32.D4@4782.01,1967.99 ; FLASH1.10@4779.06,665 v2(4828.47,665) ; v2(4829.25,1826.26) EFM32.H6@4845,1842.01 ; EFM32.L7@4876.5,1747.52 v2(4892.24,1731.77) ; EFM32.K7@4876.5,1779.02 v2(4892.24,1763.27) ; EFM32.C7@4876.5,1999.49 4892.24,2015.24 v2(4892.24,2020.24) ; EFM32.G9@4939.49,1873.5 4955.24,1857.76 v2(4955.24,1852.76) ; EFM32.F9@4939.49,1905 v2(4955.24,1889.25) ; EFM32.K10@4970.98,1779.02 v2(4986.73,1763.27) ; v2(5216.51,2980.16) 5255.1,2980.16 ; v2(5257,3765) H16.3@5345,3765 ; RESET_BTN.1@5720,2118.27 v2(5720,2172.61) ; RESET_BTN.3@5897.17,2118.27 v2(5897.17,2172.61)
  Bottom Layer w4: v2(90.23,2722.8) 90.23,2620.77 180,2531 v2(180,2480.09) C44.2@180,2445.43 ; v2(155,1949.91) C49.1@155,1984.57 ; v2(484.53,1784.44) C48.2@484.53,1825 ; v2(670,2004.91) C47.1@670,2039.57 ; v2(675,2289.91) C46.1@675,2324.57 ; C45.2@885,2430.43 v2(885,2465.09) ; C14.1@2579.57,1700 v2(2579.57,1734.65) ; C13.1@2579.57,1790 v2(2579.57,1824.65) ; C11.1@2584.57,1980 v2(2584.57,2014.65) ; C10.1@2584.57,2070 v2(2584.57,2104.65) ; C12.1@2588.5,1885 2588.5,1920.58 2592.5,1924.58 v2(2593.5,1924.58) ; C9.1@2655.43,2160 v2(2655.43,2194.65) ; C8.1@2655.43,2255 v2(2655.43,2289.65) ; C15.1@2745,1499.57 2745,1479.91 v2(2760,1464.91) ; C7.1@2755,2405.43 v2(2755,2440.09) ; v2(2795.42,1503.5) 2800.42,1508.5 C16.1@2840,1508.5 ; C6.1@2845,2338.5 v2(2884.58,2338.5) ; v2(2920,1464.91) 2930,1474.91 C17.1@2930,1499.57 ; C5.1@2940,2415.43 v2(2940,2450.09) ; v2(3030,1464.91) C18.1@3030,1499.57 ; C4.1@3040,2420.43 v2(3040,2455.09) ; v2(3135,1464.91) C19.1@3135,1499.57 ; C3.1@3145,2420.43 v2(3145,2455.09) ; v2(3185.42,1513.5) C20.1@3225,1513.5 ; v2(3190.42,2411.5) C2.1@3240,2411.5 ; v2(3315,1459.91) 3320,1464.91 C21.1@3320,1499.57 ; C1.1@3335,2430.43 v2(3335,2465.09) ; v2(3390,3324.91) C40.1@3390,3359.57 ; v2(3491,1904) 3491,1850.5 C24.1@3491.5,1850 ; C22.1@3500.43,1660 v2(3500.43,1694.65) ; C23.1@3500.43,1755 v2(3500.43,1789.65) ; C25.1@3500.43,1940 3500.43,1915.35 v2(3510.43,1905.35) ; v2(3672.42,2890.07) C58.1@3672.42,2924.73 ; v2(3765,3324.91) C41.1@3765,3359.57 ; v2(4122.42,2980.94) C59.1@4122.42,3015.59 ; v2(4320,3299.91) C42.1@4320,3334.57 ; v2(4427.42,2910.07) C57.1@4427.42,2944.73 ; v2(4522,1961) 4554.78,1961 4560.43,1966.65 C27.1@4560.43,1985 ; C29.1@4560.43,1795 v2(4560.43,1829.65) ; v2(4560.43,1855.35) C28.1@4560.43,1890 ; v2(4560.43,2045.35) C26.1@4560.43,2080 ; C30.1@4565.43,1700 v2(4565.43,1734.65) ; v2(4615,3309.91) C43.1@4615,3344.57 ; C31.1@4670,1635.43 v2(4670,1670.09) ; C32.2@4770,1640.43 v2(4770,1675.09) ; C33.2@4870,1640.43 v2(4870,1675.09) ; v2(4892.42,2915.07) C56.1@4892.42,2949.73 ; C34.2@4960,1640.43 4960,1670.09 4965,1675.09 v2(4970,1675.09) ; C54.1@5022.42,3010.59 v2(5022.42,3045.25) ; C35.2@5055,1635.43 v2(5055,1670.09) ; v2(5114.57,1695.35) 5124.57,1705.35 C36.2@5124.57,1730 ; v2(5129.57,1800.35) C37.2@5129.57,1835 ; v2(5139.57,2010.35) C39.2@5139.57,2045 ; v2(5205.43,1895.35) C38.1@5205.43,1930 ; C55.1@5417.42,3005.59 v2(5417.42,3040.25)
HDMI.5V: H14.2 HDMI.18 | length 789.4
  Top Layer w4: HDMI.18@2512.2,3667.76 v2(2512.2,3795)
  Signal Layer 1 w4: H14.2@1850,3795 v2(2512.2,3795)
HDMI.CEC: H12.1 HDMI.13 | length 805
  Top Layer w4: HDMI.13@2413.78,3667.76 2413.78,3747.78 v2(2414,3748)
  Signal Layer 3 w4: H12.1@1850,3360 2238,3748 v2(2414,3748)
HDMI.CLK+: H11.14 HDMI.10 | length 1258.9
  Top Layer w4: v2(2354.72,3588) HDMI.10@2354.72,3667.76
  Signal Layer 1 w4: v2(2354.72,3588) 2782.72,3160 3300,3160 H11.14@3340,3120
HDMI.CLK-: H11.16 HDMI.12 | length 1302.5
  Top Layer w4: HDMI.12@2394.09,3667.76 2394.09,3617.09 v2(2840.19,3171)
  Signal Layer 1 w4: v2(2840.19,3171) 3389,3171 H11.16@3440,3120
HDMI.D0+: H11.10 HDMI.7 | length 1140.2
  Top Layer w4: HDMI.7@2295.67,3667.76 2295.67,3707.5 2306.17,3718 v2(2325,3718)
  Signal Layer 2 w4: v2(2325,3718) 2325,3711 2857,3179 3081,3179 H11.10@3140,3120
HDMI.D0-: H11.12 HDMI.9 | length 1604.2
  Top Layer w4: HDMI.9@2335.04,3667.76 2335.04,3700 2361.02,3725.98 v2(2361.02,3735.43)
  Signal Layer 4 w4: v2(2361.02,3735.43) 2597.43,3735.43 2649,3787 3169,3787 3240,3716 H11.12@3240,3120
HDMI.D1+: H11.6 HDMI.4 | length 960
  Top Layer w4: v2(2236.61,3617) HDMI.4@2236.61,3667.76
  Signal Layer 2 w4: v2(2236.61,3617) 2701.61,3152 2908,3152 H11.6@2940,3120
HDMI.D1-: H11.8 HDMI.6 | length 1027.7
  Top Layer w4: v2(2275.98,3605) HDMI.6@2275.98,3667.76
  Signal Layer 4 w4: v2(2275.98,3605) 2555,3605 H11.8@3040,3120
HDMI.D2+: H11.2 HDMI.1 | length 875.9
  Top Layer w4: HDMI.1@2177.56,3667.76 2177.56,3520 2447.56,3250 2610,3250 H11.2@2740,3120
HDMI.D2-: H11.4 HDMI.3 | length 879.7
  Top Layer w4: v2(2216.93,3617) HDMI.3@2216.93,3667.76
  Signal Layer 4 w4: v2(2216.93,3617) 2674.93,3159 2801,3159 H11.4@2840,3120
HDMI.DDC_CLK: H13.2 HDMI.15 | length 650.7
  Top Layer w4: HDMI.15@2453.15,3667.76 v2(2453.15,3718)
  Signal Layer 1 w4: v2(2453.15,3718) 2489.15,3754 2978,3754 2987,3745 H13.2@3035,3745
HDMI.DDC_DATA: H13.4 HDMI.16 | length 765.8
  Top Layer w4: HDMI.16@2472.83,3667.76 2472.83,3617.17 v2(2473,3617)
  Signal Layer 1 w4: v2(2473,3617) 2665,3617 2761,3713 3103,3713 H13.4@3135,3745
"NetARM 20_7": "ARM 20.7" EFM32.E8 | length 1755.6
  Top Layer w4: EFM32.E8@4907.99,1936.5 v1(4923.49,1921)
  Signal Layer 2 w4: v1(4923.49,1921) 4944.49,1900 4944.49,1409.51 5625,729 5821,729 5860,690
"NetARM 20_9": "ARM 20.9" EFM32.D8 | length 1795.9
  Top Layer w4: EFM32.D8@4907.99,1967.99 v1(4924,1951.98)
  Signal Layer 2 w4: v1(4924,1951.98) 4924,1946.41 4961.42,1908.98 5110.02,1908.98 5186,1833 5419,1833 5821,1431 5821,829 5860,790